# Altium PCB PCB_CPP.PcbDoc
Units mm, origin at the board's own origin, x right, y up, seen from the top; angles counter-clockwise.
Board outline 90 x 50 mm, 2 copper layers (Top Layer, Bottom Layer); 8 components, 8 nets, 40 pads, 0 vias.
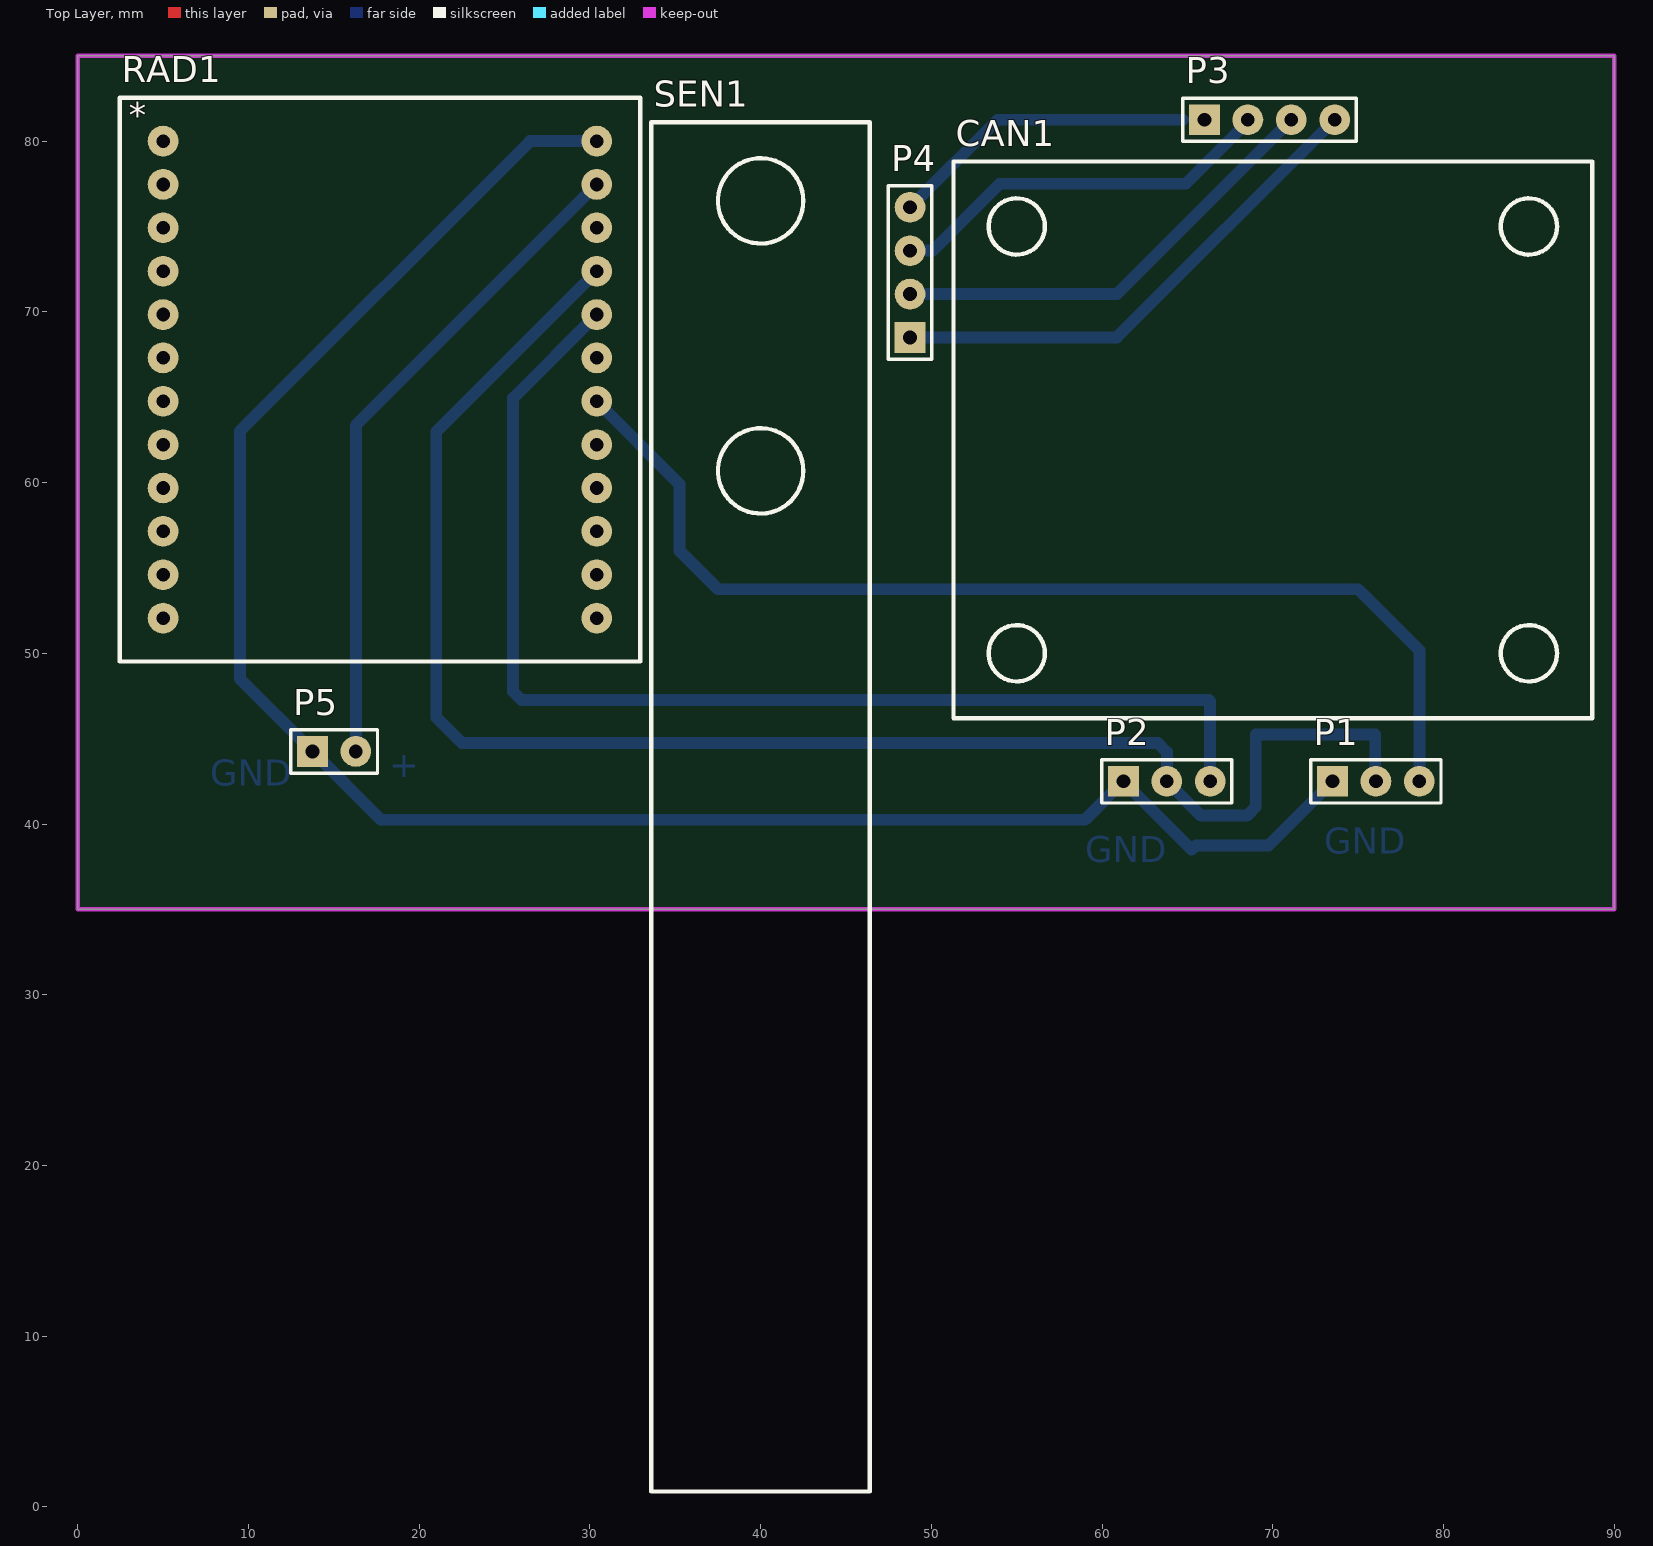
[diagram p0: Top Layer view]
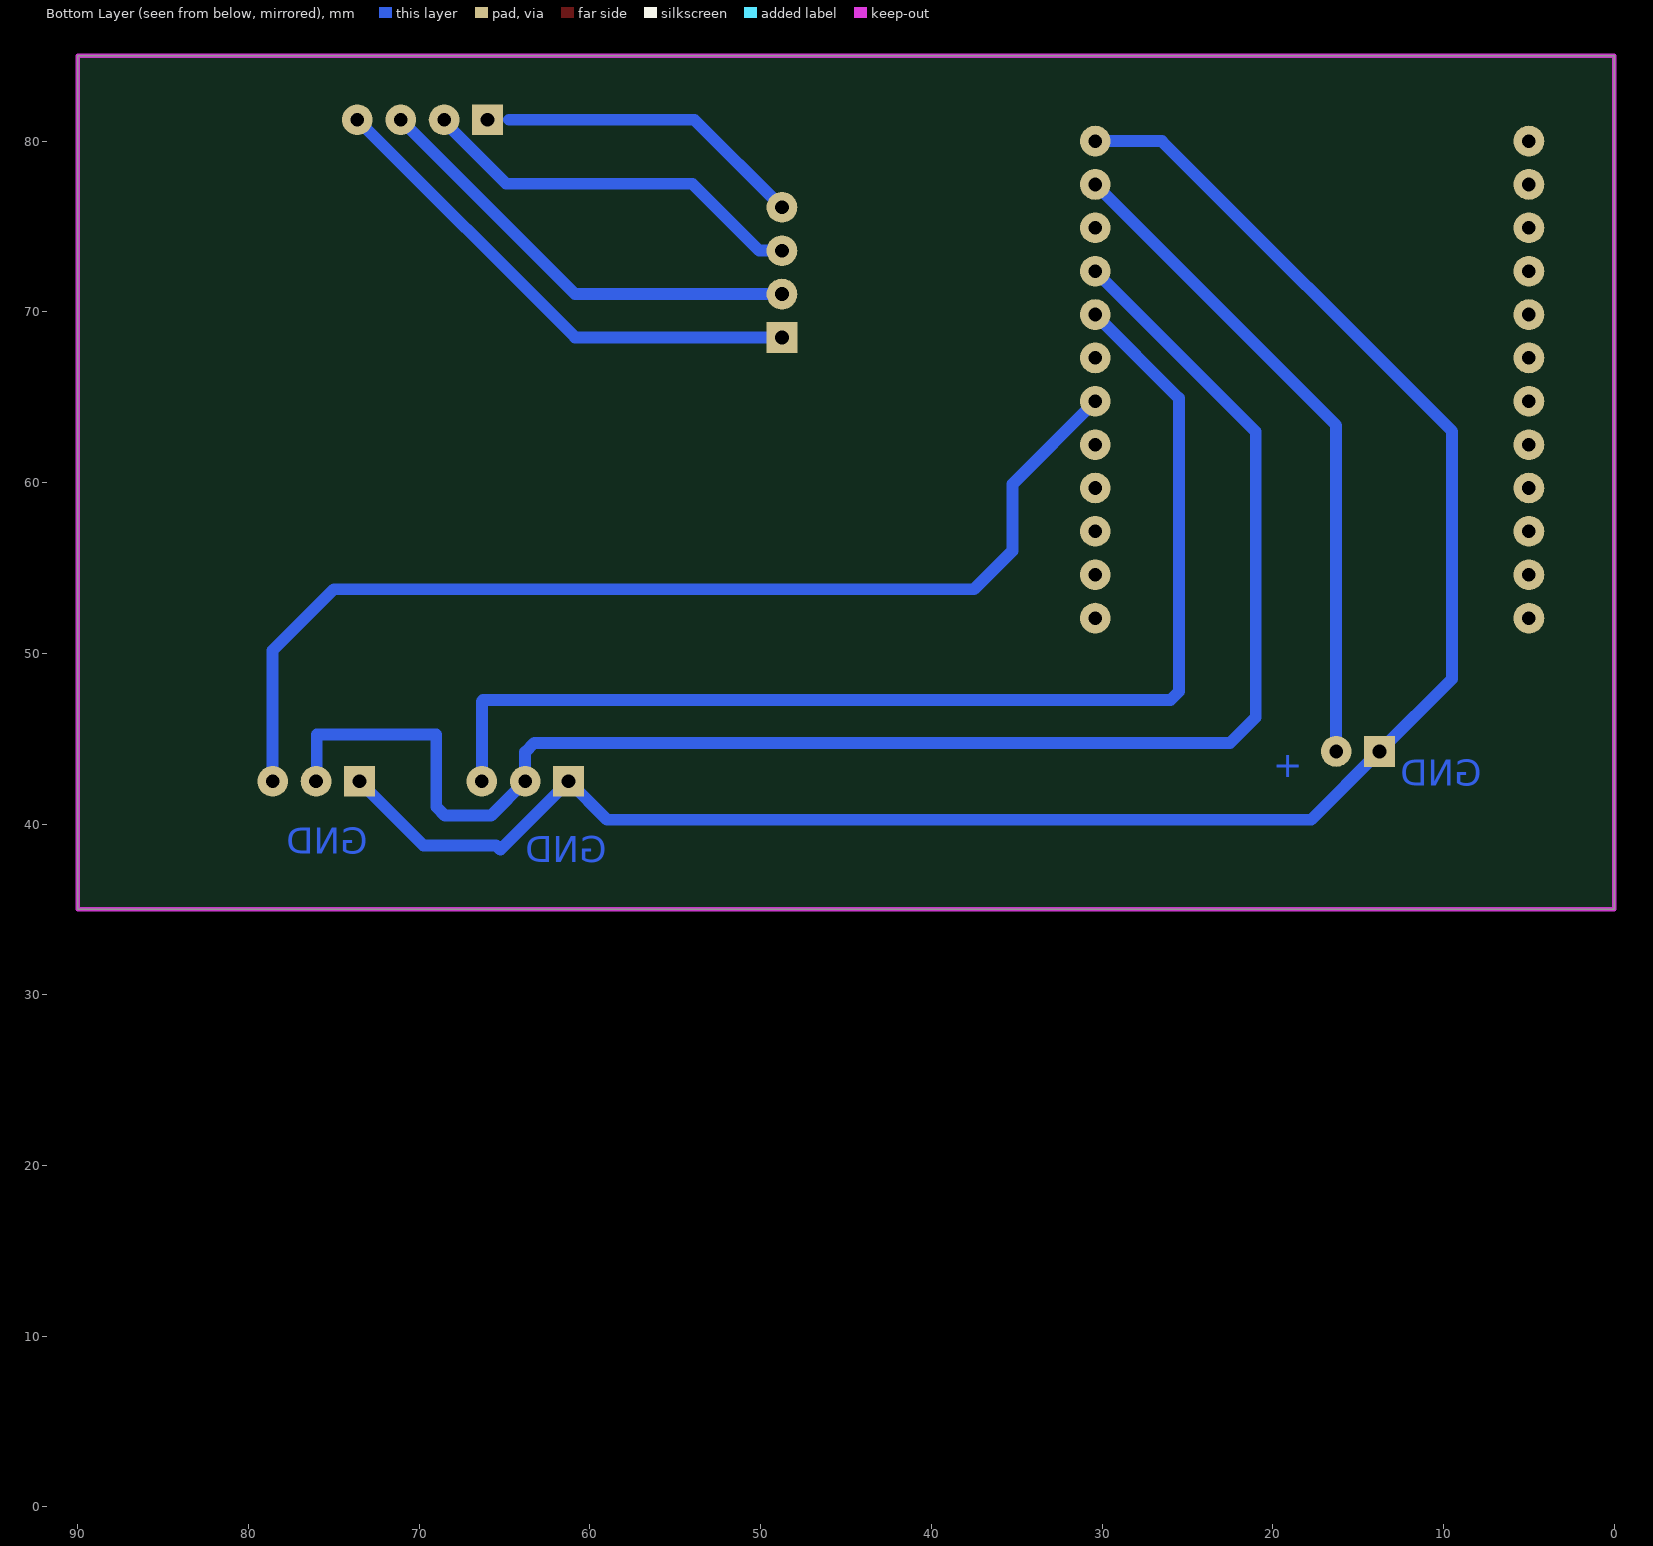
[diagram p1: Bottom Layer view, seen from below]

## Layer stack, top to bottom
Top Solder: solder mask 0.0102, Solder Resist, Dk 3.5
Top Layer: signal copper 0.0356
Dielectric 1: dielectric 0.32, FR-4, Dk 4.8
Bottom Layer: signal copper 0.0356
Bottom Solder: solder mask 0.0102, Solder Resist, Dk 3.5

## Board outline
0,35 90,35 90,85 0,85

## Design rules (kind name [scope] priority, off if disabled: settings)
Clearance [All] p1: gap=0.254
PolygonConnect [All] p1: connectstyle=Relief reliefconductorwidth=0.254 reliefentries=4 polygonreliefangle="90 Angle" airgapwidth=0.254
RoutingVias [All] p1: holewidth=0.8 width=1.5 viastyle="Through Hole" minholewidth=0.8 minwidth=1.5 maxholewidth=0.8 maxwidth=1.5
SolderMaskExpansion [All] p1: expansion=0.102
UnpouredPolygon [All] p1: allowunpoured=FALSE
Width [All] p1: maxlimit=1 minlimit=0.5 preferedwidth=0.5
29 further rules are at their usual default settings.

## Components (designator, comment, footprint, x,y, rotation, side; value= is the part's Value field where it differs from the comment)
CAN1 "CAN" CAN 70,62.5 r180 top
P1 "Header 3" HDR1X3 73.5,42.5 r0 top
P2 "Header 3" HDR1X3 61.25,42.5 r0 top
P3 "Header 4" HDR1X4 66,81.25 r0 top
P4 "Header 4" HDR1X4 48.75,68.5 r90 top
P5 "Header 2" HDR1X2 13.75,44.25 r0 top
RAD1 "Radon" radon 5,80 r0 top locked
SEN1 "skuSEN0160" skuSEN0160 40,41 r180 top

## Footprints (in the part's own frame and the unit in brackets; to place one, negate y for a bottom-side part, rotate by r counter-clockwise, add the part's x,y. Pads: shape width x height; smd on the part's side, far side on the other; paste and mask are expansions set on the pad)
CAN [mm] "CAN for weight sensor"
  silkscreen extent -18.7,-16.3 18.7,16.3
HDR1X2 [mm] "Connector; Header; 2 Position"
  rect 1.8x1.8 hole 0.8: 1(0,0)
  round 1.8 hole 0.8: 2(2.54,0)
  silkscreen extent -1.27,-1.27 3.81,1.27
HDR1X3 [mm] "Connector; Header; 3 Position"
  rect 1.8x1.8 hole 0.8: 1(0,0)
  round 1.8 hole 0.8: 2(2.54,0) 3(5.08,0)
  silkscreen extent -1.27,-1.27 6.35,1.27
HDR1X4 [mm] "Connector; Header; 4 Position"
  rect 1.8x1.8 hole 0.8: 1(0,0)
  round 1.8 hole 0.8: 2(2.54,0) 3(5.08,0) 4(7.62,0)
  silkscreen extent -1.27,-1.27 8.89,1.27
radon [mm]
  round 1.8 hole 0.8: 1(0,0) 2(0,-2.54) 3(0,-5.08) 4(0,-7.62) 5(0,-10.16) 6(0,-12.7) 7(0,-15.24) 8(0,-17.78) 9(0,-20.32) 10(0,-22.86) 11(0,-25.4) 12(0,-27.94) 13(25.4,0) 14(25.4,-2.54) 15(25.4,-5.08) 16(25.4,-7.62) 17(25.4,-10.16) 18(25.4,-12.7) 19(25.4,-15.24) 20(25.4,-17.78) 21(25.4,-20.32) 22(25.4,-22.86) 23(25.4,-25.4) 24(25.4,-27.94)
  silkscreen extent -2.54,-30.48 27.94,2.54
skuSEN0160 [mm] "weight sensor skuSEN0160"
  silkscreen extent -6.4,-40.1 6.4,40.1

## Part data
CAN1: "CAN for weight sensor skuSEN0160"
P1 P2: "Header, 3-Pin"
P3 P4: "Header, 4-Pin"
P5: "Header, 2-Pin"
RAD1: "Arduino Radon"
SEN1: "weight sensor skuSEN0160"

## Nets (pads, with @x,y where several pads share a name; then routed paths per layer and width w, separated by ;. In a path a pad name is that pad's centre, name@x,y a point inside that pad or via, vN(x,y) a via of type N, cw(c..) or ccw(c..) an arc to the next point about the centre after c; other vN are vias at no path point)
GND: P1.1 P2.1 P5.1 RAD1.13 | length 114.4
  Bottom Layer w0.7: RAD1.13 26.5,80 9.5,63 9.5,48.5 P5.1 17.75,40.25 59,40.25 P2.1 65.25,38.5 65.5,38.75 69.75,38.75 P1.1 P1.1@73.5,42.25
NetP1_2: P1.2 P2.2 RAD1.16 | length 95.6
  Bottom Layer w0.7: RAD1.16 21,62.98 21,46.25 22.5,44.75 63.25,44.75 63.79,44.21 P2.2 65.79,40.5 68.5,40.5 69,41 69,45.25 76,45.25 76,42.54 P1.2
NetP1_3: P1.3 RAD1.19 | length 64.2
  Bottom Layer w0.7: RAD1.19 35.25,59.91 35.25,56 37.5,53.75 75,53.75 78.58,50.17 P1.3
NetP2_3: P2.3 RAD1.17 | length 69.9
  Bottom Layer w0.7: RAD1.17 25.5,64.94 25.5,47.75 26,47.25 61.58,47.25 66.25,47.25 66.33,47.17 P2.3
NetP3_2: P3.2 P4.3 | length 23
  Bottom Layer w0.7: P4.3 50.08,73.58 54,77.5 64.904,77.5 68.54,81.136 P3.2
NetP3_3: P3.3 P4.2 | length 26.6
  Bottom Layer w0.7: P4.2 60.87,71.04 P3.3
NetP3_4: P3.4 P4.1 | length 30.2
  Bottom Layer w0.7: P4.1 60.87,68.5 P3.4
NetP5_2: P5.2 RAD1.14 | length 39.1
  Bottom Layer w0.7: P5.2 16.29,63.35 18.345,65.405 RAD1.14
pads on no net: P3.1 P4.4 RAD1.1 RAD1.2 RAD1.3 RAD1.4 RAD1.5 RAD1.6 RAD1.7 RAD1.8 RAD1.9 RAD1.10 RAD1.11 RAD1.12 RAD1.15 RAD1.18 RAD1.20 RAD1.21 RAD1.22 RAD1.23 RAD1.24
copper on no net: | length 18.1
  Bottom Layer w0.7: 48.75,76.12 53.88,81.25 64.746,81.25

## Keep-outs
Keep-Out Layer:
  the board outline again, w0.254

## Other copper
Bottom Layer:
  text "+" at 18.25,42.75 h1.52
  text "GND" at 7.75,42.25 h1.52
  text "GND" at 73,38.25 h1.52
  text "GND" at 59,37.75 h1.52

## Silkscreen, mask and mechanical layers (free items; w line width, h text height)
Top Overlay:
  text "*" at 3,80.75 h1.52